# EAGLE board test_in (EAGLE 7.4.0)
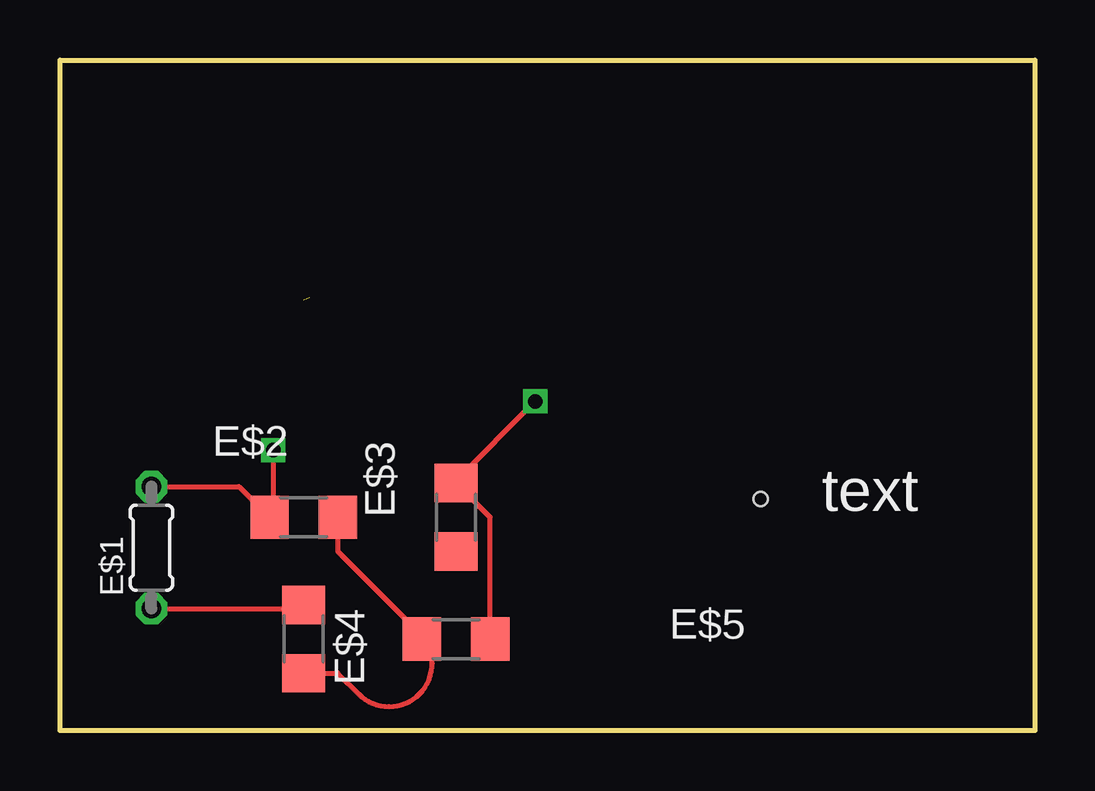
[diagram p0: board, top side]
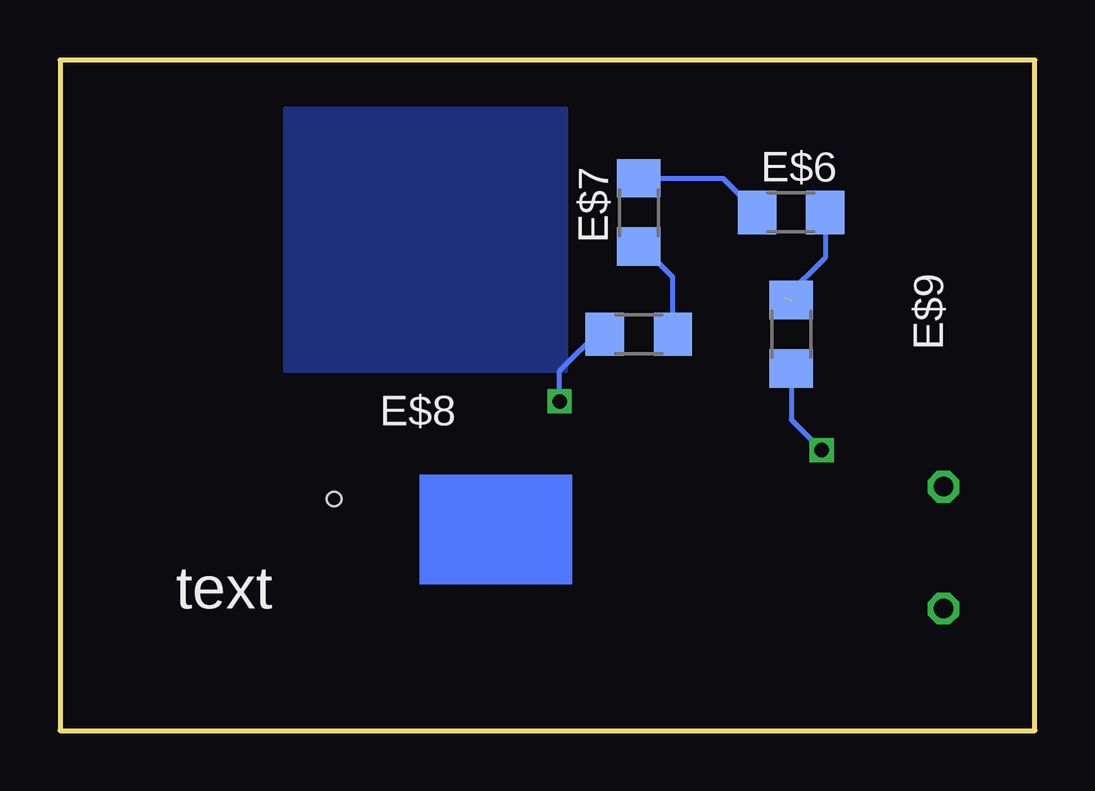
[diagram p1: board, bottom side, seen from below]

Size 40.64 x 27.94 mm. Coordinates in mm from the lower left corner, seen from the top.
Outline: 0,0 0,27.94 40.64,27.94 40.64,0 0,0
Copper layers (1*16): Top 0.035mm / dielectric 1.5mm / Bottom 0.035mm
Design rules "default": minimum track width 10mil, minimum drill 24mil, track to track 8mil, track to pad 8mil, pad to pad 8mil, via to via 8mil, smd to smd 8mil, copper to edge 40mil, drill to drill 8mil, minimum pad ring 10mil, minimum via ring 8mil, stop-mask expansion 4mil, vias tented up to drill 0mil, thermal gap 10mil
Holes 0.6 mm at 29.21,9.65

## Footprints (pad centres in the part's own frame; a part is rotated, then mirrored left to right if it is on the bottom)
0204/5 = drill 0.813 octagon: 1 -2.54,0; 2 2.54,0
R1206 = smd 1.6 x 1.803: 1 -1.422,0; 2 1.422,0

## Placement (x,y rotation side)
E$1  [0204/5]  3.81,7.62 90 top
E$2  [R1206]  10.16,8.89 0 top
E$3  [R1206]  16.51,8.89 90 top
E$4  [R1206]  10.16,3.81 270 top
E$5  [R1206]  16.51,3.81 0 top
E$6  [R1206]  10.16,21.59 0 bottom
E$7  [R1206]  16.51,21.59 90 bottom
E$8  [R1206]  16.51,16.51 180 bottom
E$9  [R1206]  10.16,16.51 270 bottom

## Library data of the parts
E$1-E$9 = rcl

## Nets
S$1: E$1.1 E$4.1
S$2: E$2.2 E$4.2 E$5.1
S$3: E$3.2 E$5.2 E$8.2
S$4: E$7.1 E$8.1
S$5: E$6.1 E$7.2
S$6: E$6.2 E$9.1
S$7: E$1.2 E$2.1 E$9.2

## Tracks (layer width: path | path; a pad name or v marks a point on that pad's centre or on a via)
S$1
  Top 0.203: E$1.1 9.65,5.08 9.91,5.33 10.06,5.33 E$4.1
S$2
  Top 0.203: E$4.2 11.58,2.39 12.45,1.52 arc180 14.99,4.06 | 14.99,4.06 arc314 E$5.1 | E$2.2 11.58,7.47 14.99,4.06
S$3  (via drill 0.6)
  Top 0.203: E$5.2 17.93,8.89 E$3.2 16.51,10.41 v19.81,13.72
  Bottom 0.203: v19.81,13.72 19.81,14.99 18.03,16.76 18.03,16.61 E$8.2
  pour Bottom: 19.56,14.99 31.24,14.99 31.24,25.91 19.56,25.91
S$4
  Bottom 0.203: E$8.1 15.09,18.9 16.51,20.32 | 16.51,20.32 16.76,20.32 16.51,20.07 E$7.1 16.51,20.32
S$5
  Bottom 0.203: E$7.2 13,23.01 E$6.1
S$6  (1 unrouted)
  Bottom 0.203: E$6.2 8.74,19.71 10.41,18.03
S$7  (via drill 0.6)
  Top 0.203: v8.89,11.68 8.89,8.74 | 8.89,8.64 8.89,8.74 | 8.89,8.74 E$2.1 7.47,10.16 E$1.2
  Bottom 0.203: E$9.2 10.16,12.95 v8.89,11.68
(copper drawn outside any net)
  shapes: Bottom area x1

## Text on the board
tPlace: text
bPlace: text